# Altium PCB PCB1.PcbDoc
Units mm, origin at the board's own origin, x right, y up, seen from the top; angles counter-clockwise.
Board outline 76.07 x 60.58 mm, 4 copper layers (Top Layer, Int1 (GND), Int2 (PWR), Bottom Layer), stack 1.075 mm thick; 30 components, 31 nets, 155 pads, 45 vias.
Unrouted connection lines stored in the file: 1.
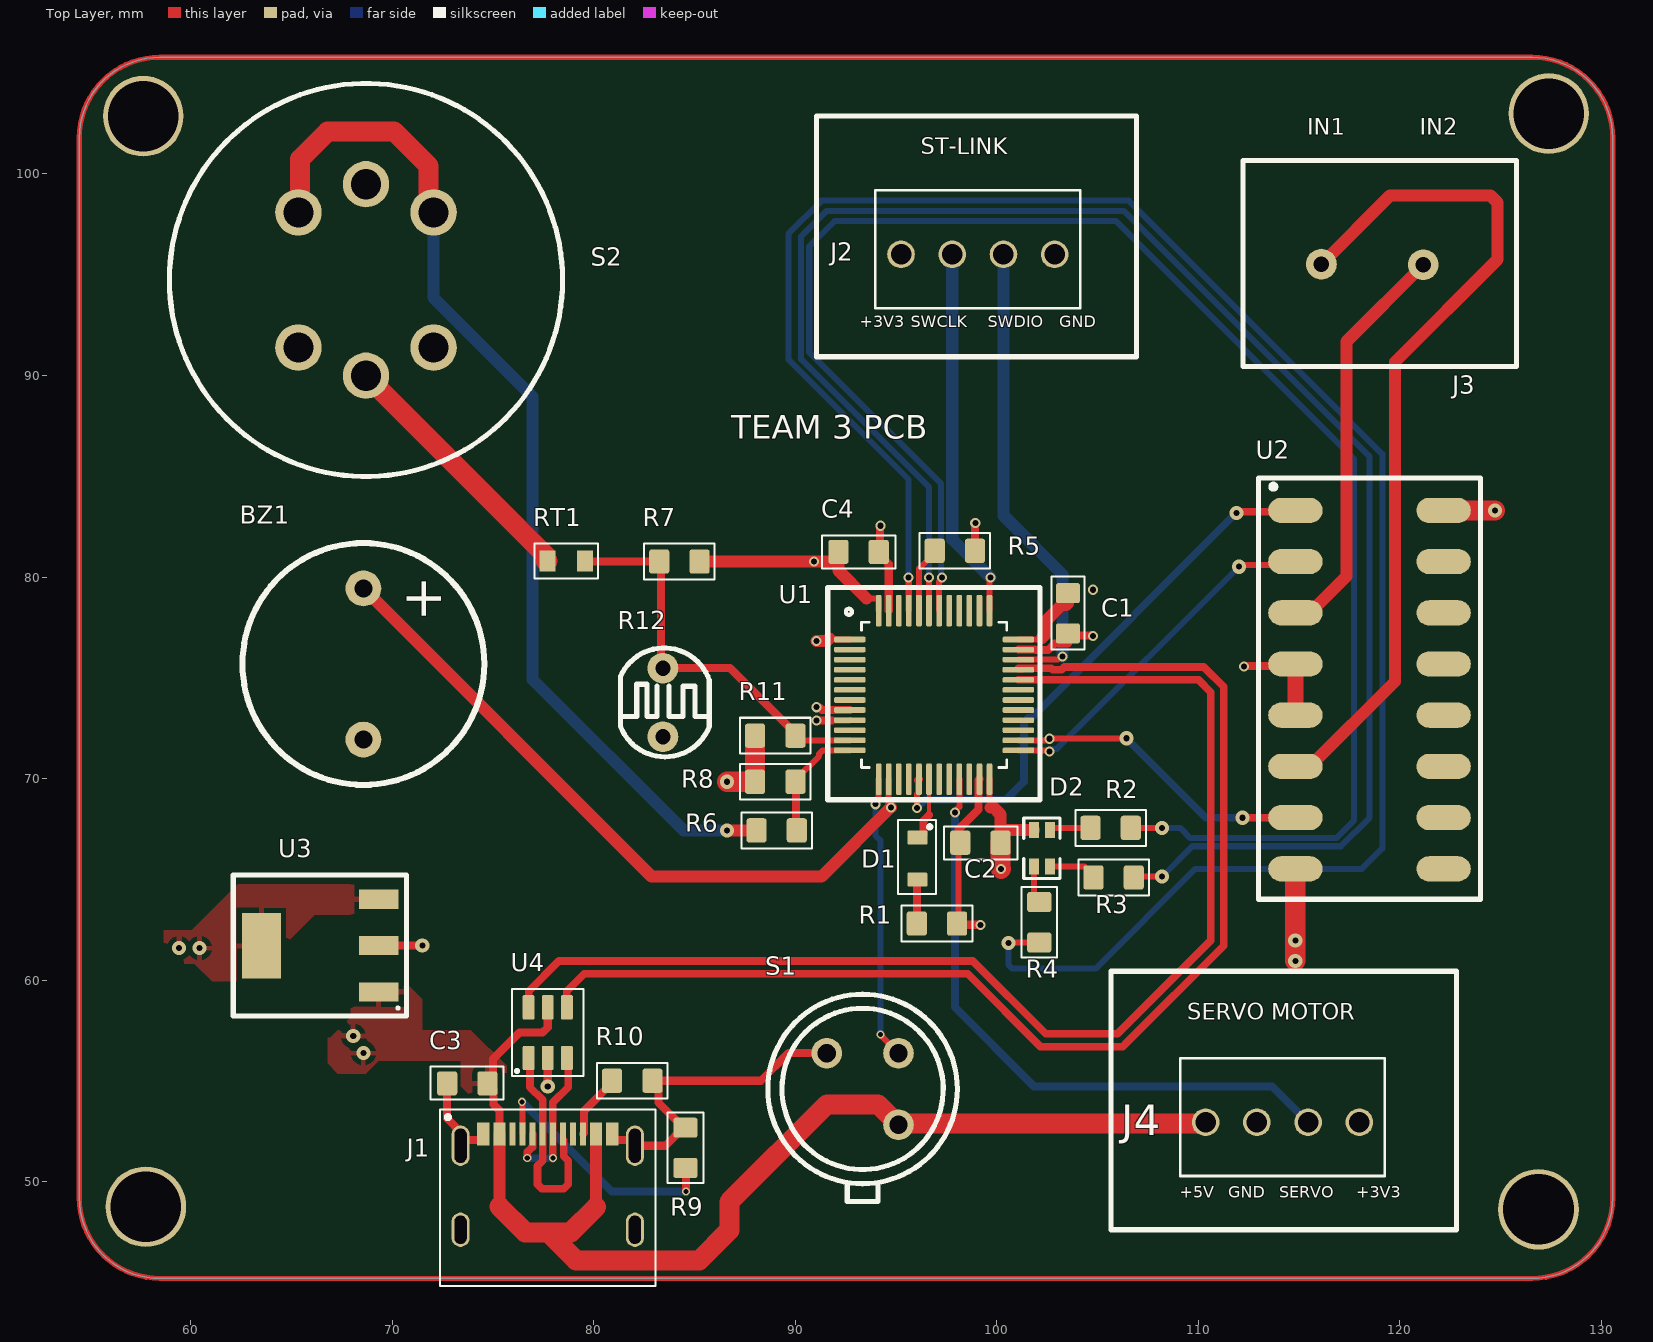
[diagram p0: Top Layer view]
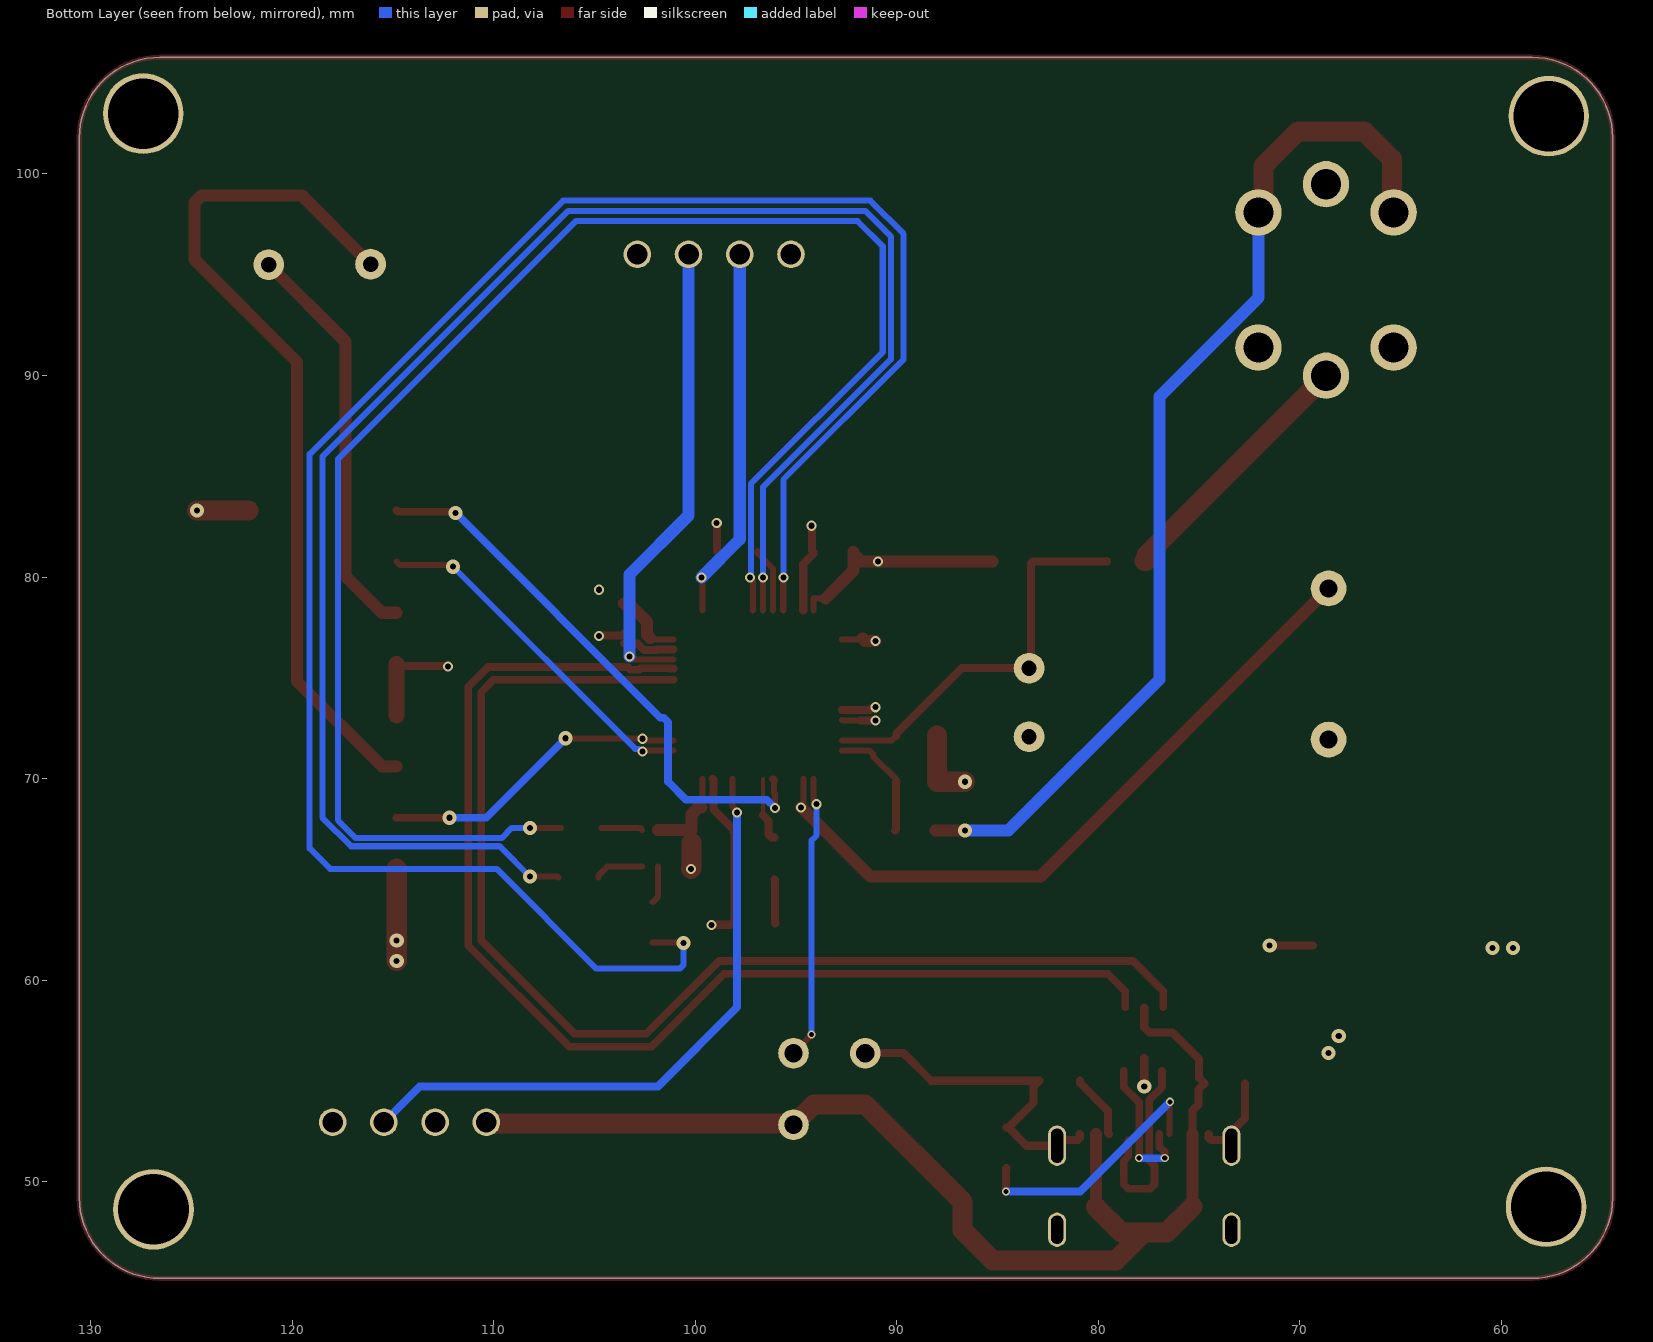
[diagram p1: Bottom Layer view, seen from below]
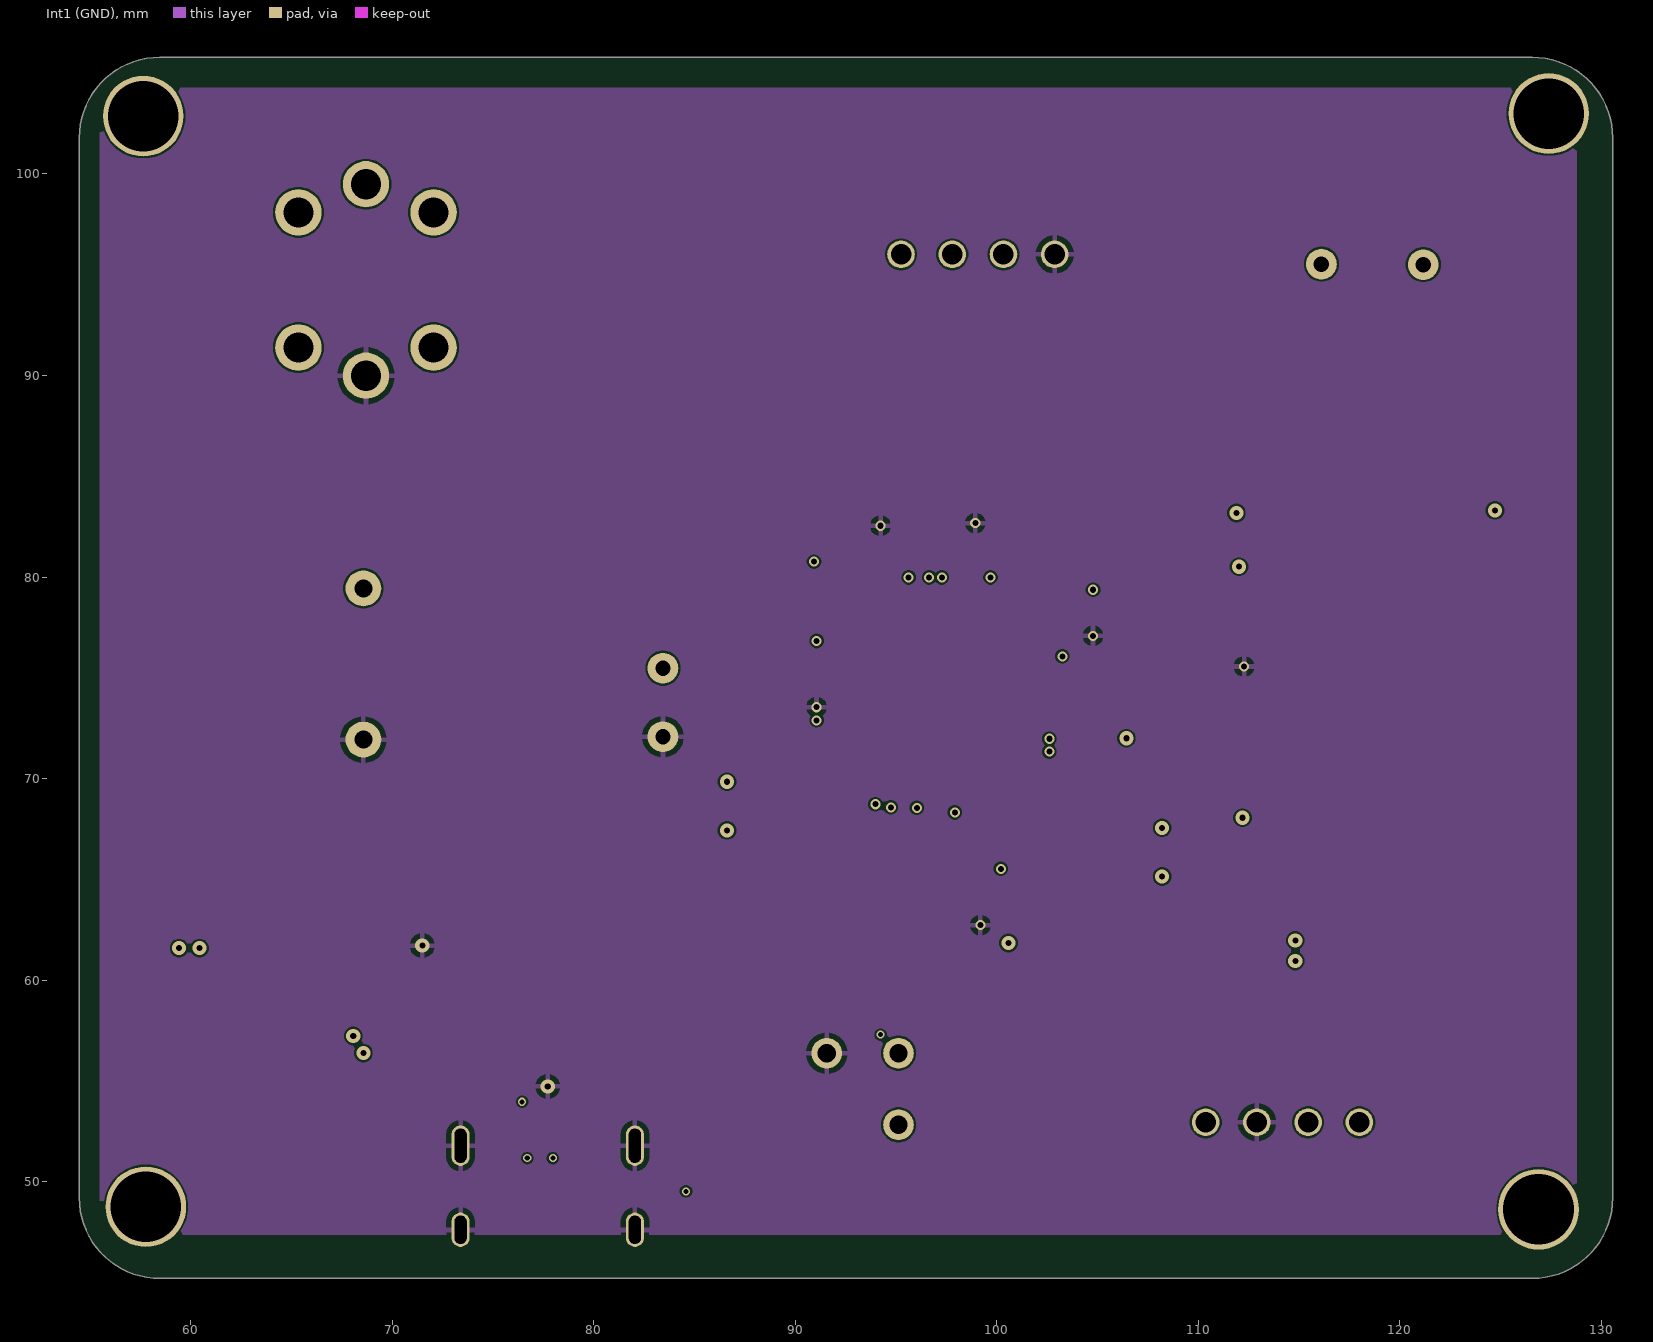
[diagram p2: Int1 (GND)]
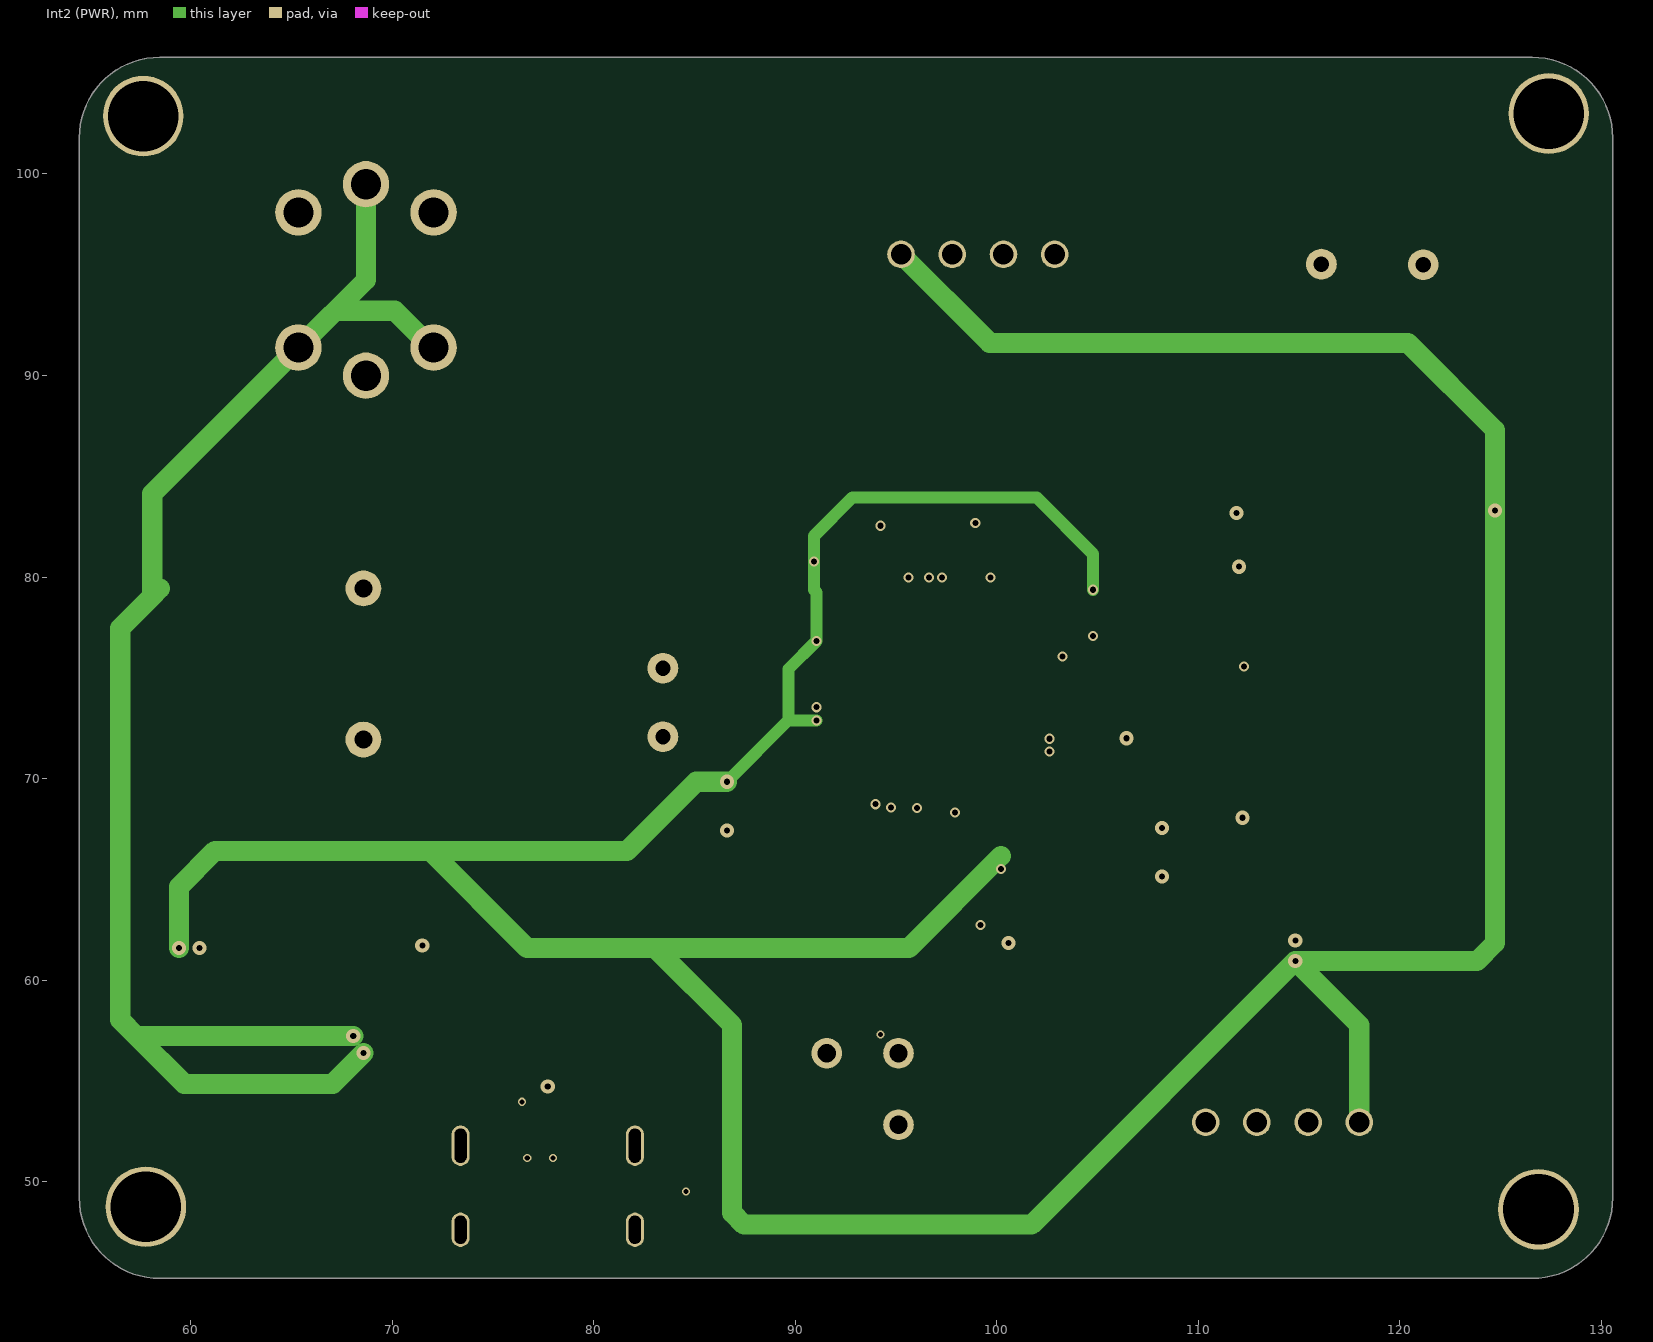
[diagram p3: Int2 (PWR)]

## Layer stack, top to bottom
Top Solder: solder mask 0.0254, SM-001, Dk 4
Top Layer: signal copper 0.035
Dielectric 2: prepreg 0.1295, PP-017, Dk 4.3
Int1 (GND): signal copper 0.0175
Dielectric 3: core 0.7112, Core-039, Dk 4.8
Int2 (PWR): signal copper 0.0175
Dielectric 4: prepreg 0.1295, PP-017, Dk 4.3
Bottom Layer: signal copper 0.035
Bottom Solder: solder mask 0.0254, SM-001, Dk 4

## Board outline
54.483,49.212 54.483,101.791 cw(c58.483,101.791) 58.483,105.791 126.556,105.791 cw(c126.556,101.791) 130.556,101.791 130.556,49.212 cw(c126.556,49.212) 126.556,45.212 58.483,45.212 cw(c58.483,49.212)

## Design rules (kind name [scope] priority, off if disabled: settings)
Clearance [All] p1: gap=0.1 ignorepadtopadclearanceinfootprint=FALSE
DiffPairsRouting [All] p1: maxlimit=0.254 minlimit=0.254 mostfreqgap=0.254 toplayer_minwidth=0.381 toplayer_maxwidth=0.381 toplayer_prefwidth=0.381 midlayer1_minwidth=0.381 midlayer1_maxwidth=0.381 midlayer1_prefwidth=0.381 midlayer2_minwidth=0.381 midlayer2_maxwidth=0.381 midlayer2_prefwidth=0.381 bottomlayer_minwidth=0.381 bottomlayer_maxwidth=0.381 bottomlayer_prefwidth=0.381 maxuncoupledlength=12.7
PolygonConnect [All] p1: connectstyle=Relief reliefconductorwidth=0.254 reliefentries=4 polygonreliefangle="90 Angle" airgapwidth=0.254
RoutingVias [All] p1: holewidth=3 width=1.27 viastyle="Through Hole" minholewidth=0.15 minwidth=1.27 maxholewidth=6.3 maxwidth=6.3
SolderMaskExpansion [All] p1: expansion=0 istentingtop=FALSE
SupplyNets "Schematic Supply Nets_3" [InNet('VBUS')] p1: voltage=0.000
SupplyNets "Schematic Supply Nets_2" [InNet('PA2')] p2: voltage=0.000
SupplyNets "Schematic Supply Nets_1" [InNet('+3.3V')] p3: voltage=0.000
SupplyNets "Schematic Supply Nets" [InNet('GND')] p4: voltage=0.000
UnRoutedNet [All] p1: checkbadconnections=TRUE
Width [All] p1: maxlimit=1 minlimit=0.2 preferedwidth=0.4 minimp=50.000000 maximp=50.000000 favimp=50.000000
28 further rules are at their usual default settings.

## Classes and differential pairs
differential pair class USB_DIFF: USB_D
differential pair class ESD_DIFF: ESD
component class Sheet3: C1 C2 D1 D2 J3 J4 R1 R2 R3 R4 R5 R6 R7 R8 RT1 S1 S2 U1 U2
component class Sheet1: BZ1 C3 C4 J1 J2 Q1 R9 R10 R11 R12 U3 U4
differential pair USB_D: +USB_D_P -USB_D_N
differential pair ESD: +ESD_P -ESD_N

## Components (designator, comment, footprint, x,y, rotation, side; value= is the part's Value field where it differs from the comment)
BZ1 "Buzzer" BUZZER 68.58,75.692 r270 top
C1 "C_1uF" CAP_1uF 103.505,78.232 r270 top
C2 "C_10nF" CAP_10nF 99.187,66.802 r180 top
C3 "C_10uF" CAP_10uF 73.66,54.864 r0 top
C4 "C_10uF" CAP_10uF 93.218,81.28 r180 top
D1 "Yellow_LED" LED_YELLOW 96.012,66.04 r270 top
D2 "RGB_LED" RGB_LED 102.235,66.548 r270 top
J1 "USB_Type_C" USB_TYPE_C 77.724,47.625 r0 top
J2 "ST-LINK" 4_MALE_HEADER 99.06,96.012 r0 top
J3 "Terminal" "Terminal Block" 118.694,95.656 r180 top
J4 "4_Male_Header" 4_MALE_HEADER 114.173,52.959 r0 top
R1 "R_220Ω" RES_220 97.028,62.865 r0 top
R2 "R_220Ω" RES_220 105.645,67.611 r0 top
R3 "R_220Ω" RES_220 105.791,65.151 r0 top
R4 "R_220Ω" RES_220 102.155,62.884 r270 top
R5 "R_1kΩ" RES_1K 97.917,81.28 r0 top
R6 "R_10KΩ" RES_10K 89.027,67.437 r0 top
R7 "R_10KΩ" RES_10K 84.201,80.772 r0 top
R8 "R_10KΩ" RES_10K 89.064,69.853 r180 top
R9 "R_5.1KΩ" RES_5.1K 84.582,51.689 r90 top
R10 "R_5.1KΩ" RES_5.1K 81.915,54.991 r0 top
R11 "R_10KΩ" RES_10K 89.064,72.139 r180 top
R12 "Photoresistor" PHOTORESISTOR 83.439,73.787 r180 top
RT1 "THERMISTOR" NTC_THERMISTOR 78.613,80.772 r180 top
S1 "muRata IRA" OPTICAL_SENSOR 93.345,54.61 r90 top
S2 "Gas sensors" GAS_SENSOR 68.707,94.742 r0 top
U1 "STM32F103C8T6" STM32 96.889,74.182 r0 top
U2 "L293D Motor Driver" L293D 118.491,74.422 r0 top
U3 "AMS1117-3.3" AMS1117_3.3V 66.421,61.722 r180 top
U4 "ESD_Protection" ESD_PROTECTION 77.724,57.404 r90 top

## Footprints (in the part's own frame and the unit in brackets; to place one, negate y for a bottom-side part, rotate by r counter-clockwise, add the part's x,y. Pads: shape width x height; smd on the part's side, far side on the other; paste and mask are expansions set on the pad)
4_MALE_HEADER [mm]
  round 1.37 hole 1.02: 188(-3.81,0) 189(-1.27,0) 190(1.27,0) 191(3.81,0)
  silkscreen extent -5.08,-2.67 5.08,3.18, body extent -5.08,-2.67 5.08,3.17, height 9.53
AMS1117_3.3V [mm] "SOT223, 4-Leads, Body 6.48x7.00mm (avg), Pitch 2.30mm, IPC Medium Density"
  rect 1.95x0.95 smd: 1(-2.925,0) 2(-2.925,2.3) 3(-2.925,-2.3)
  rect 1.95x3.25 smd: 3(2.9,0)
  silkscreen extent -4.3,-3.5 4.3,3.5, body extent -1.75,-3.24 1.75,3.24, height 1
BUZZER [mil]
  round 70 hole 35.4: 1(-147.7,0) 2(147.6,0)
  silkscreen extent -236,-236 236,236, body extent -236,-236 236,236, height 354
CAP_1uF [mm]
  rrect25% 1x1.2 smd: 1(-0.975,0.025) 2(1.025,0.025)
  silkscreen extent -1.8,-0.79 1.83,0.85, body extent -0.97,-0.6 1.03,0.65, height 0.4
CAP_10nF [mm]
  rrect25% 1x1.2 smd: 1(-1,-0.025) 2(1,-0.025)
  silkscreen extent -1.83,-0.84 1.8,0.8, body extent -1,-0.65 1.01,0.6, height 0.4
CAP_10uF [mm]
  rrect25% 1x1.2 smd: 1(-0.925,0.025) 2(1.075,0.025)
  silkscreen extent -1.75,-0.79 1.88,0.85, body extent -0.92,-0.6 1.08,0.65, height 0.4
ESD_PROTECTION [mm]
  rrect25% 1.21x0.59 smd: 140(-1.255,0.95) 141(-1.255,0) 142(-1.255,-0.95) 143(1.255,0.95) 144(1.255,0) 145(1.255,-0.95)
  silkscreen extent -2.16,-1.78 2.16,1.78, body extent -1.4,-1.46 1.4,1.46, height 1.42
GAS_SENSOR [mil]
  round 90.6 hole 59.1: 1(-132,132) 2(0,187) 3(132,132) 4(132,-132) 5(0,-187) 6(-132,-132)
  silkscreen extent -384,-384 384,384, body extent -344,-344 344,344, height 585
L293D [mm] "SOJ, 16-Leads, Body 20.00x8.80mm, Pitch 2.54mm, IPC Low Density"
  oval 2.7x1.25 smd: 1(-3.675,8.89) 2(-3.675,6.35) 3(-3.675,3.81) 4(-3.675,1.27) 5(-3.675,-1.27) 6(-3.675,-3.81) 7(-3.675,-6.35) 8(-3.675,-8.89) 9(3.675,-8.89) 10(3.675,-6.35) 11(3.675,-3.81) 12(3.675,-1.27) 13(3.675,1.27) 14(3.675,3.81) 15(3.675,6.35) 16(3.675,8.89)
  silkscreen extent -5.5,-10.4 5.5,10.5, body extent -3.55,-10 3.55,10, height 2.5
LED_YELLOW [mm]
  rrect25% 0.7x1 smd: 1(-1.041,0.051) 2(1.041,0.051)
  silkscreen extent -1.91,-0.91 1.75,0.97, body extent -0.97,-0.57 1.03,0.68, height 0.75
NTC_THERMISTOR [mm]
  rect 0.8x1.05 smd: 1(-0.95,-0.025) 2(0.9,-0.025)
  silkscreen extent -1.6,-0.9 1.55,0.85, body extent -1.03,-0.63 0.97,0.57, height 1.3
OPTICAL_SENSOR [mil]
  round 60 hole 36: 1(-70,-70) 2(70,-70) 3(70,70)
  silkscreen extent -220,-185 185,185, body extent -220,-182 183,180, height 193
PHOTORESISTOR [mil]
  round 60 hole 30: 1(0,66.9) 2(0,-66.9)
  silkscreen extent -91,-106 83,106, body extent -84,-101 84,99, height 94
RES_1K [mm]
  rrect25% 1x1.2 smd: 1(-0.997,0.028) 2(1.003,0.028)
  silkscreen extent -1.75,-0.86 1.76,0.92, body extent -1,-0.62 1,0.68, height 0.5
RES_5.1K [mm]
  rrect25% 1x1.2 smd: 1(-0.997,0.028) 2(1.003,0.028)
  silkscreen extent -1.75,-0.86 1.76,0.92, body extent -1,-0.62 1,0.68, height 0.5
RES_10K [mm]
  rrect25% 1x1.2 smd: 1(-0.947,0.003) 2(1.053,0.003)
  silkscreen extent -1.7,-0.89 1.81,0.89, body extent -0.95,-0.65 1.05,0.65, height 0.5
RES_220 [mm]
  rrect25% 1x1.2 smd: 1(-0.997,-0.047) 2(1.003,-0.047)
  silkscreen extent -1.75,-0.94 1.76,0.84, body extent -1,-0.7 1,0.6, height 0.5
RGB_LED [mil]
  rect 31.5x19.7 smd paste+0 mask+2: 1(-35.5,15.8) 2(35.4,15.8) 3(35.4,-15.7) 4(-35.5,-15.7)
  silkscreen extent -59,-35 59,35, body extent -39,-25 39,25, height 43
STM32 [mm] "LQFP, 48-Leads, Body 11.50x11.50mm, Pitch 0.50mm, IPC Medium Density"
  rrect50% 1.56x0.28 smd: 1(-4.18,2.725) 2(-4.18,2.225) 3(-4.18,1.725) 4(-4.18,1.225) 5(-4.18,0.725) 6(-4.18,0.225) 7(-4.18,-0.275) 8(-4.18,-0.775) 9(-4.18,-1.275) 10(-4.18,-1.775) 11(-4.18,-2.275) 12(-4.18,-2.775) 25(4.18,-2.775) 26(4.18,-2.275) 27(4.18,-1.775) 28(4.18,-1.275) 29(4.18,-0.775) 30(4.18,-0.275) 31(4.18,0.225) 32(4.18,0.725) 33(4.18,1.225) 34(4.18,1.725) 35(4.18,2.225) 36(4.18,2.725)
  rrect50% 0.28x1.56 smd: 13(-2.75,-4.205) 14(-2.25,-4.205) 15(-1.75,-4.205) 16(-1.25,-4.205) 17(-0.75,-4.205) 18(-0.25,-4.205) 19(0.25,-4.205) 20(0.75,-4.205) 21(1.25,-4.205) 22(1.75,-4.205) 23(2.25,-4.205) 24(2.75,-4.205) 37(2.75,4.155) 38(2.25,4.155) 39(1.75,4.155) 40(1.25,4.155) 41(0.75,4.155) 42(0.25,4.155) 43(-0.25,4.155) 44(-0.75,4.155) 45(-1.25,4.155) 46(-1.75,4.155) 47(-2.25,4.155) 48(-2.75,4.155)
  silkscreen extent -5.28,-5.23 5.25,5.3, body extent -4.5,-4.53 4.5,4.47, height 1.6
"Terminal Block" [mil]
  round 60 hole 30: 15(-97,6) 16(102,5)
  silkscreen extent -279,-197 255,205, body extent -223,-156 201,166, height 394
USB_TYPE_C [mm]
  rect 0.6x1.14 smd mask+0.05: 36(-2.4,4.75) 37(2.4,4.75) 46(-3.2,4.75) 47(3.2,4.75)
  rect 0.3x1.14 smd mask+0.05: 38(-1.25,4.75) 39(-0.25,4.75) 40(0.25,4.75) 41(1.25,4.75) 42(1.75,4.75) 43(0.75,4.75) 44(-0.75,4.75) 45(-1.75,4.75)
  oval 0.9x2 hole 0.6 slot 1.7 at 90 deg: 48(-4.325,4.17) 50(4.325,4.17)
  oval 0.9x1.7 hole 0.6 slot 1.4 at 90 deg: 49(-4.325,0) 51(4.325,0)
  silkscreen extent -5.33,-2.79 5.33,5.97, body extent -4.47,-2.6 4.47,5.31, height 3.31

## Part data
BZ1: "Active Buzzer (Built-in Driving Circuit) 2.4kHz 5V Electromagnetic Through Hole,D=12mm Alarms, Buzzers, and Sirens RoHS", ComponentLink1Description=Datasheet, ComponentLink1URL=https://www.lcsc.com/datasheet/C6143962.pdf?spm=wm.sxq.inf.ggs___wm.fly.bg.26.xh&lcsc_vid=EwQNUwAFEwJeBFwCQlANU10CTwBcVlBTFAMMV1FeQFkxVlNeT1hfV1VeRFhaVDsOAxUeFF5JWBYZEEoKFBINSQcJGk4eFQsCAgIaSgADAwAHC0slRlNdU1RIHxUDCw%3D%3D, MF=CUI, MPU=CMI-1295IC-0585T, Supplier=LCSC, Supplier part #=C6143962
C1: "CAP CER 1uF 50V X7R 0805", MFR="Samsung Electro-Mechanics", MFR Part #=CL21B105KBFNNNE, ComponentLink1Description="Supplier Part Page", ComponentLink1URL=https://www.lcsc.com/product-detail/C28323.html?s_z=n_q_t_capacitor%25201uF%25200805&spm=wm.fly.bg.0.xh___wm.ssy.tc.0.tz&lcsc_vid=RVdfAQAHTlQNBQIDRgNYVAdUQ1hWXlBRQ1kLVlcDRVkxVlNeQFNcUlVTRVdZXjsOAxUeFF5JWBYZEEoKFBINSQcJGk4NBhADEA4cHktXRlVcSQwSGg0%3D, Supplier=LCSC, Supplier part #=C28323
C2: "CAP CER 10nF 50V X7R 0805", MFR="Samsung Electro-Mechanics", MFR part#=CL21B103KBANNNC, ComponentLink1Description=Datasheet, ComponentLink1URL=https://www.lcsc.com/datasheet/C1710.pdf?spm=wm.sxq.inf.ggs___wm.fly.bg.0.xh&lcsc_vid=E1EMUFFTQQILUVRVRlhaUAYEQ1RWA1RTFlhWXwYAQlkxVlNeT1hWUldWT1NZUDsOAxUeFF5JWBYZEEoKFBINSQcJGk4dAgUUFAk%3D, Supplier=LCSC, Suppliere part #=C1710
C3 C4: "CAP CER 10uF 25V X5R 0805", MFR="Samsung Electro-Mechanics", MFR Part #=CL21A106KAYNNNE, ComponentLink1Description="Suplpier Part Page", Supplier=LCSC, Supplier part #=C15850
D1: "LED YELLOW GREEN 0805 SMD", ComponentLink1Description=Datasheet, ComponentLink1URL=https://www.lcsc.com/datasheet/C19171393.pdf?spm=wm.sxq.inf.ggs___wm.fly.bg.6.xh&lcsc_vid=E1EMUFFTQQILUVRVRlhaUAYEQ1RWA1RTFlhWXwYAQlkxVlNeT1JYU1JRRFhbVTsOAxUeFF5JWBYZEEoKFBINSQcJGk4dAgUUFAk%3D, MFU=YONGYUTAI, MFU code #=YLED0805YG, Supplier=LCSC, Supplier code #=C19171393
D2: "120° SMD-4P,2x1.2mm LED Indication - Discrete", MPN=MHT170RGBCT, ComponentLink1Description=Datasheet, ComponentLink1URL=https://www.lcsc.com/datasheet/C2962094.pdf?spm=wm.sxq.inf.ggs&lcsc_vid=EwQNUwAFEwJeBFwCQlANU10CTwBcVlBTFAMMV1FeQFkxVlNeT1deXlFfQlVbVztW, MF=MEIHUA, Supplier=LCSC, Supplier part #=C2962094
J1: "CONN RCPT Type-C 16POS SMD", MFR="Korean Hroparts Elec", MFR Part #=TYPE-C-31-M-12, ComponentLink1Description="Supplier Part Link", ComponentLink1URL=https://www.lcsc.com/product-detail/C165948.html?s_z=n_q_p_USB%2520type%2520C%2520jack&spm=wm.ssy.bg.1.xh&lcsc_vid=RVdfAQAHTlQNBQIDRgNYVAdUQ1hWXlBRQ1kLVlcDRVkxVlNeQVRbX1xSR1hWXjsOAxUeFF5JWBYZEEoKFBINSQcJGk4dAgUUFAk%3D, Supplier=LCSC, Supplier part #=C165948
J2: library part 4_Male_Header, "PCB Mount Header, Vertical, Wire-to-Board, 4 Position, 2.54 mm Centerline, Partially Shrouded, Gold, Through Hole - Solder, Signal", MFR="TE Connectivity", MFR Part #=3-641215-4, ComponentLink1Description="Supplier Part Page", ComponentLink1URL=https://www.lcsc.com/product-detail/C5119032.html?s_z=n_q_3-641215-4&spm=wm.fly.bg.0.xh&lcsc_vid=RVdfAQAHTlQNBQIDRgNYVAdUQ1hWXlBRQ1kLVlcDRVkxVlNeQFNcX1FURVRaVzsOAxUeFF5JWBYZEEoKFBINSQcJGk4dAgUUFAk%3D, Supplier=LCSC, Supplier part #=C5119032
J3: "0.05~1.3 -40℃~+110℃ 13.5A 1x2P Green 16~30 Through Hole 2 1 5.08mm Through Hole Wire to Board RoHS", MFR="TE Connectivity", MFR Part #=282837-2, ComponentLink1Description="Supplier Page Link", ComponentLink1URL=https://www.lcsc.com/product-detail/C592976.html?s_z=n_q_282837-2&spm=wm.fly.bg.0.xh&lcsc_vid=RVdfAQAHTlQNBQIDRgNYVAdUQ1hWXlBRQ1kLVlcDRVkxVlNeQVVbUVJXT1RdUTsOAxUeFF5JWBYZEEoKFBINSQcJGk4NBhADEA4cHkteQ1NADxALGw%3D%3D, Supplier=LCSC, Supplier part #=C592976
J4: "PCB Mount Header, Vertical, Wire-to-Board, 4 Position, 2.54 mm Centerline, Partially Shrouded, Gold, Through Hole - Solder, Signal", MFR="TE Connectivity", MFR Part #=3-641215-4, ComponentLink1Description="Supplier Part Page", ComponentLink1URL=https://www.lcsc.com/product-detail/C5119032.html?s_z=n_q_3-641215-4&spm=wm.fly.bg.0.xh&lcsc_vid=RVdfAQAHTlQNBQIDRgNYVAdUQ1hWXlBRQ1kLVlcDRVkxVlNeQFNcX1FURVRaVzsOAxUeFF5JWBYZEEoKFBINSQcJGk4dAgUUFAk%3D, Supplier=LCSC, Supplier part #=C5119032
R1 R2 R3 R4: "RES 220Ω ±1% 125mW 0805", MFR=UNI-ROYAL, MFR Part #=0805W8F2200T5E, ComponentLink1Description="Supplier Part Page", ComponentLink1URL=https://www.lcsc.com/product-detail/C17557.html?s_z=n_q_resistor%2520220%2520ohm%25200805&spm=wm.fly.bg.0.xh&lcsc_vid=RVdfAQAHTlQNBQIDRgNYVAdUQ1hWXlBRQ1kLVlcDRVkxVlNeQFBaUVdQRVVeUDsOAxUeFF5JWBYZEEoKFBINSQcJGk4eFQsCAgIaSgADAwAHC0slQFRfXkoOAwwC, Supplier=LCSC, Supplier part #=C17557
R5: "RES 1kΩ ±1% 100mW 0805", ComponentLink1Description=Datasheet, ComponentLink1URL=https://www.lcsc.com/datasheet/C2907002.pdf?spm=wm.sxq.inf.ggs___wm.fly.bg.3.xh&lcsc_vid=QAQMVlZTQQVfVwJVQgNaVAUDRlAKAlQCTwJdAQVSRFgxVlNeQVZcVl1fTlhaUjsOAxUeFF5JWBYZEEoEHg8JSQcJGk4%3D, MFU=FOJAN, MFU part #=FRC0603F1001TS, Supplier=LCSC, Supplier part #=C2907002
R6 R7 R8 R11: "RES 10kΩ ±1% 125mW 0805", MFR=FOJAN, MFR Part #=FRC0805F1002TS, ComponentLink1Description="Supplier Part Page", ComponentLink1URL=https://www.lcsc.com/product-detail/C2907219.html?s_z=n_q_p_resistor%252010K%2520ohm%25200805&spm=wm.ssy.bg.0.xh&lcsc_vid=RVdfAQAHTlQNBQIDRgNYVAdUQ1hWXlBRQ1kLVlcDRVkxVlNeQFBaUVNST1NfVjsOAxUeFF5JWBYZEEoKFBINSQcJGk4dAgUUFAk%3D, Supplier=LCSC, Supplier part #=C2907219
R9 R10: "RES 5.1kΩ ±1% 125mW 0805", MFR=UNI-ROYAL, MFR Part #=0805W8F5101T5E, ComponentLink1Description="Supplier Part Page", ComponentLink1URL=https://www.lcsc.com/product-detail/C27834.html?s_z=n_q_p_resistor%25205.1K%2520ohm%25200805&spm=wm.ssy.bg.0.xh&lcsc_vid=RVdfAQAHTlQNBQIDRgNYVAdUQ1hWXlBRQ1kLVlcDRVkxVlNeQFBaUVFQRlVeUTsOAxUeFF5JWBYZEEoKFBINSQcJGk4NBhADEA4cHktXRlhXSQwSGg0%3D, Supplier=LCSC, Supplier part #=C27834
R12: "540nm 5kΩ~10kΩ 500kΩ Through Hole,P=3mm Photoresistors", MPN=GL5516, ComponentLink1Description=Datasheet, ComponentLink1URL=https://www.lcsc.com/datasheet/C125626.pdf?spm=wm.sxq.inf.ggs___wm.ssy.bg.1.xh&lcsc_vid=E1EMUFFTQQILUVRVRlhaUAYEQ1RWA1RTFlhWXwYAQlkxVlNeT1JYU1dRT1heVTsOAxUeFF5JWBYZEEoKFBINSQcJGk4NBhADEA4cHktQRVVADxALGw%3D%3D, MF="Senba Sensing Tech", Supplier=LCSC, Supplier part #=C125626
RT1: "THERMISTOR NTC 10kΩ 3950K 0805", MPN #=KNTC0805/10KF3950, ComponentLink1Description=Datasheet, ComponentLink1URL=https://www.lcsc.com/datasheet/C2892549.pdf?spm=wm.sxq.inf.ggs___wm.fly.bg.2.xh&lcsc_vid=E1EMUFFTQQILUVRVRlhaUAYEQ1RWA1RTFlhWXwYAQlkxVlNeT1JYVV1fQVFWVzsOAxUeFF5JWBYZEEoKFBINSQcJGk4%3D, MF=KUU, Supplier=LCSC, Supplier part #=C2892549
S1: "Through Hole Optical Motion Sensors RoHS", MPN=IRA-S210ST01, ComponentLink1Description=Datasheet, ComponentLink1URL=https://www.lcsc.com/datasheet/C152563.pdf?spm=wm.sxq.inf.ggs___wm.fly.bg.0.xh&lcsc_vid=E1EMUFFTQQILUVRVRlhaUAYEQ1RWA1RTFlhWXwYAQlkxVlNeT1JYVFZXRVhcUDsOAxUeFF5JWBYZEEoKFBINSQcJGk4dAgUUFAk%3D, MF=muRata, Supplier=LCSC, Supplier part #=C152563
S2: "300ppm~10000ppm Through Hole Gas Sensors", MPN=MQ-5, ComponentLink1Description=Datasheet, ComponentLink1URL=https://www.lcsc.com/datasheet/C99297.pdf?spm=wm.sxq.inf.ggs___wm.ssy.em.0.tz&lcsc_vid=E1EMUFFTQQILUVRVRlhaUAYEQ1RWA1RTFlhWXwYAQlkxVlNeT1JYVF1QQ1ZWUjsOAxUeFF5JWBYZEEoKFBINSQcJGk4eFQsCAgIaSgADAwAHC0slQ1NaVFVeQVZADxALGw%3D%3D, MF="Zhengzhou Winsen Elec Tech", Supplier=LCSC, Supplier part #=C99297
U1: "-40℃~+85℃ 12bit 20KB 2V~3.6V 32 Bit 37 64KB 72MHz ARM Cortex-M3 Built-in FLASH LQFP-48(7x7) Microcontrollers (MCU/MPU/SOC) ROHS", MFR Part #=STMicroelectronics, ComponentLink1Description=Datasheet, ComponentLink1URL=https://jlc-prod-smt.oss-eu-central-1.aliyuncs.com/smtDataManualFile/8579708215770480640-C8734.pdf?response-content-disposition=attachment%3B%20filename%3DC8734.pdf%3B%20filename%2A%3DUTF-8%27%27C8734.pdf&x-oss-date=20260822T112136Z&x-oss-expires=1800&x-oss-security-token=CAISgAN1q6Ft5B2yfSjIr5r9HuPMuopW9JKdbW3Sg0MBbvdkhped1jz2IHhMdHJsAOodtv0%2FmmhT6PkclqRLcbhpcmfjV%2BZHzLB8qf5B%2Bykr557b16cNrbH4M4H6aXeirtuwDsz9SNTCALjPD3nPii50x5bjaDymRCbLGJaViJlhHLN1Ow6jdmhpCctxLAlvo9NgFxm3D%2Fu2NQPwiWf9FVdhvhEG6Vly8qOi2MaRmFy8yFTx0b0SvJ%2BjYMrmPctoN9JnSdC5mfdzau3a1TJ84gRD0a5wkaVA1zbDs5bfISEIuUzebreLqY03dV4mOvdqIcMe8qigz88fk%2FfIioH6xyxKOexoSCnFTOiiupCcQLPyao9jLu6iayqViY7QaIOTqQohZmkAMwVOasAsI3Ngh4zF97Qt0cVNkXO9gWfLI8DtuMleWmpnyfoJs6HD0eS19jklBdzSlusJRAJJUVBflCeKEaRNSAd3WGhEfM2%2BBt4QT30w5N2u00S8OSMILh50ZKKWD5sagAERxjOFVQunN%2FMP%2B4pPj192lIv%2Fb%2FBhYoH1dXybskWmVsGIA0U6FIyufmkP83RoZanjtyEj%2FMYM6ZCoxn9wNR1FUWyys6LeuQiyfFaBwd42eAW9cxY8QGfZwYhiboSH%2Bd%2FHYxRsYJhTEvCPbbJHyAklPAFDR4R0AEccKLctMzybhSAA&x-oss-signature-version=OSS4-HMAC-SHA256&x-oss-credential=STS.NYHUYxWUwCPvoKcgCTbxHiR64%2F20260822%2Feu-central-1%2Foss%2Faliyun_v4_request&x-oss-signature=046f7eb699a18f694d803c947e8fbc0a7e9770749a7982aa4ec2455890b0bf02, MF=STMicroelectronics, Supplier=JLCPCB, Supplier part #=C8734
U2: "PUSH-PULL FOUR CHANNEL DRIVER WITH DIODES", MFR=HGSEMI, ComponentLink1Description=Datasheet, ComponentLink1URL=https://www.lcsc.com/datasheet/C2973803.pdf?spm=wm.sxq.inf.ggs___wm.fly.bg.1.xh&lcsc_vid=E1EMUFFTQQILUVRVRlhaUAYEQ1RWA1RTFlhWXwYAQlkxVlNeT1hZUFxVT1RXVzsOAxUeFF5JWBYZEEoKFBINSQcJGk4%3D, MRF Part #=L293DDM/TR, Supplier=LCSC, Supplier part #=C2973803
U3: "1A Low Dropout (LDO) Regulator", ComponentLink1Description=Datasheet, ComponentLink1URL=https://www.lcsc.com/datasheet/C6187.pdf?spm=wm.sxq.inf.ggs&lcsc_vid=QAQMVlZTQQVfVwJVQgNaVAUDRlAKAlQCTwJdAQVSRFgxVlNeQVZcVFVRRFlWUzsOAxUeFF5JWBYZEEoEHg8JSQcJGk4%3D, MFU="Advanced Monolithic Systems", MFU part #=AMS1117-3.3, Supplier=LCSC, Supplier part #=C6186
U4: "ESD DIODE 5.25VWM 17VC SOT-23-6L", MFR=ST, MFR Part #=USBLC6-2SC6, ComponentLink1Description="Supplier Part Page", ComponentLink1URL=https://www.lcsc.com/product-detail/C7519.html?s_z=s_p_USBLC6-2SC6&spm=wm.fly.bg.0.xh&lcsc_vid=RVdfAQAHTlQNBQIDRgNYVAdUQ1hWXlBRQ1kLVlcDRVkxVlNeQFBaVF1VT1haUTsOAxUeFF5JWBYZEEoKFBINSQcJGk4dAgUUFAk%3D, Supplier=LCSC, Supplier part #=C7519

## Free pads (board coordinates)
  round 4 hole 3.5: 29(57.658,102.87) 30(127.381,102.997) 31(126.873,48.641) 32(57.785,48.768)

## Via types
v1: diameter 0.5, hole 0.3, Top Layer to Bottom Layer, 21 vias
v2: diameter 0.7, hole 0.3, Top Layer to Bottom Layer, tented both sides, 17 vias
v3: diameter 0.4, hole 0.25, Top Layer to Bottom Layer, 5 vias
v4: diameter 0.5, hole 0.3, Top Layer to Bottom Layer, tented both sides, 1 vias
v5: diameter 0.7, hole 0.3, Top Layer to Bottom Layer, 1 vias

## Nets (pads, with @x,y where several pads share a name; then routed paths per layer and width w, separated by ;. In a path a pad name is that pad's centre, name@x,y a point inside that pad or via, vN(x,y) a via of type N, cw(c..) or ccw(c..) an arc to the next point about the centre after c; other vN are vias at no path point)
+3.3V: C1.1 C2.1 C4.2 D2.4 J2.188 J4.191 R7.2 R8.2 R11.2 U1.1 U1.9 U1.24 U1.36 U1.48 U2.8 U2.16 U3.3 | length 258.9
  Top Layer w0.3: 91.694,76.962 91.739,76.917 92.699,76.917 U1.1 ; 91.821,72.898 92.7,72.898 U1.9 ; 93.529,78.947 94.129,78.947 94.139,78.937 U1.48 ; U1.24 99.639,68.636 99.695,68.58 ; U1.36 101.079,76.917 102.175,76.917 102.235,76.977
  Top Layer w0.4: v1(91.059,72.898) 91.821,72.898
  Top Layer w0.6: R7.2 91.763,80.775 92.143,81.155 C4.2 92.143,80.333 93.529,78.947 ; v1(91.059,76.835) 91.567,76.835 91.694,76.962 ; 99.695,68.58 99.836,68.58 100.187,68.229 100.187,67.462 100.193,67.456 101.83,67.456 D2.4 ; 102.235,76.977 102.381,77.123 102.381,77.777 103.23,78.626 103.457,78.626 103.53,78.699
  Top Layer w1: v2(86.614,69.85) R8.2 R11.2 ; C2.1 100.187,65.548 v4(100.203,65.532) ; v2(114.808,60.96) v2(114.808,61.976) 114.808,65.524 U2.8 ; U2.16 v2(124.714,83.312)
  Int2 (PWR) w0.6: v2(86.614,69.85) 89.662,72.898 ; v1(91.059,72.898) 89.662,72.898 ; v1(104.775,79.375) 104.775,81.153 101.981,83.947 92.837,83.947 90.932,82.042 v1(90.932,80.772) 90.932,79.375 91.059,79.248 v1(91.059,76.835) 89.662,75.438 89.662,72.898
  Int2 (PWR) w1: v2(59.436,61.595) 59.436,64.643 61.214,66.421 71.882,66.421 ; v2(86.614,69.85) 85.09,69.85 81.661,66.421 71.882,66.421 ; J2.188 99.642,91.62 120.393,91.62 124.714,87.298 v2(124.714,83.312) 124.714,61.849 123.825,60.96 v2(114.808,60.96) ; 100.203,66.167 95.631,61.595 83.058,61.595 ; J4.191 117.983,57.785 v2(114.808,60.96) ; 71.882,66.421 76.708,61.595 83.058,61.595 ; 83.058,61.595 86.868,57.785 86.868,48.465 87.454,47.879 101.727,47.879 v2(114.808,60.96)
  other v2: 60.452,61.595
ESD_N: U1.33 U4.145 | length 60.8
  Top Layer w0.381: U4.145 78.674,59.454 79.545,60.325 98.552,60.325 102.167,56.71 106.249,56.71 106.435,56.896 111.252,61.713 111.252,74.558 110.268,75.542 103.357,75.542 103.221,75.406 102.773,75.406 102.702,75.476 101.261,75.476 101.251,75.466 U1.33@101.069,75.466
ESD_P: U1.32 U4.143 | length 60.8
  Top Layer w0.381: U4.143 76.774,59.454 78.28,60.96 98.815,60.96 102.43,57.345 105.986,57.345 110.617,61.976 110.617,74.295 110.005,74.907 U1.32
GND: BZ1.2 C1.2 C2.2 C3.1 C4.1 J1.46 J1.47 J1.48 J1.49 J1.50 J1.51 J2.191 J4.189 R1.2 R5.2 R9.2 R10.2 R12.1 RT1.2 S1.3 S2.5 U1.8 U1.23 U1.35 U1.47 U2.4 U2.5 U3.1 U4.141 | length 63.1
  Top Layer w0.3: R1.2@98.109,62.896 C2.2@98.109,67.384
  Top Layer w0.4: U3.1 v2(71.501,61.722) ; C3.1 72.735,53.144 73.399,52.48 J1.48@73.399,51.854 ; J1.48 J1.48@73.399,51.854 ; J1.46 74.524,52.185 74.424,52.085 73.63,52.085 J1.48@73.399,51.854 ; v5(77.724,54.737) U4.141 ; J1.47 80.924,52.185 81.024,52.085 81.818,52.085 82.049,51.854 J1.50 83.558,51.795 R9.2@84.454,52.692 ; R9.2 R9.2@84.454,52.692 ; v1(91.059,73.548) 91.078,73.529 91.207,73.529 91.329,73.407 U1.8 ; S1.3 89.662,56.388 88.293,55.019 R10.2 83.218,54.719 83.218,53.928 R9.2@84.454,52.692 ; C4.1@94.143,81.155 94.639,80.659 U1.47 ; C4.1 94.215,81.327 94.215,82.531 v1(94.234,82.55) ; R1.2@98.109,62.896 98.248,62.757 99.168,62.757 v1(99.187,62.738) ; C2.2@98.109,67.384 98.109,67.484 99.095,68.47 99.095,69.933 U1.23 ; R5.2 98.926,81.314 98.926,82.67 v1(98.933,82.677) ; U1.35 101.901,76.407 101.931,76.377 102.544,76.377 102.866,76.699 103.53,76.699 ; C1.2 103.629,77.108 104.756,77.108 v1(104.775,77.089) ; v1(112.268,75.565) 112.287,75.584 114.708,75.584 U2.4
  Top Layer w0.8: U2.5 U2.4
  Top Layer w1: S2.5 77.613,81.086 77.613,80.822 77.638,80.797 RT1.2
NetD1_2: D1.2 R1.1 | length 2.2
  Top Layer w0.4: R1.1 96.047,62.834 96.047,64.983 D1.2
NetD2_1: D2.1 R2.1 | length 2.1
  Top Layer w0.3: D2.1 102.636,67.464 102.737,67.564 R2.1
NetD2_2: D2.2 R3.1 | length 2.4
  Top Layer w0.3: D2.2 104.349,65.649 104.794,65.204 R3.1
NetD2_3: D2.3 R4.1 | length 1.9
  Top Layer w0.3: D2.3 101.836,64.153 R4.1
NetJ1_38: J1.38 R9.1 | length 12.7
  Top Layer w0.3: v3(76.454,53.975) 76.454,53.948 76.474,53.928 J1.38
  Top Layer w0.4: R9.1 84.582,50.664 v3@84.582,49.558
  Bottom Layer w0.4: v3(76.454,53.975) 80.899,49.53 v3(84.582,49.53)
NetJ1_42: J1.42 R10.1 | length 3.2
  Top Layer w0.4: J1.42 79.524,52.425 79.524,53.525 80.918,54.919 R10.1
NetJ3_15: J3.15 U2.3 | length 20.3
  Top Layer w0.6: U2.3 115.541,78.232 117.348,80.039 117.348,91.694 J3.15
NetJ3_16: J3.16 U2.6 | length 42.8
  Top Layer w0.6: U2.6 115.541,70.612 119.761,74.832 119.761,90.678 124.841,95.758 124.841,98.582 124.49,98.933 119.507,98.933 J3.16
NetR5_1: R5.1 U1.44 | length 3.3
  Top Layer w0.3: U1.44 96.139,80.427 96.92,81.208 R5.1
NetR6_1: R6.1 S2.1 S2.3 | length 52.2
  Top Layer w0.6: v2(86.614,67.437) 86.615,67.438 R6.1 R6.1
  Top Layer w1: S2.1 65.439,98.18 65.439,100.745 66.802,102.108 70.104,102.108 71.811,100.401 71.811,98.344 S2.3
  Bottom Layer w0.6: S2.3 72.06,93.865 76.962,88.963 76.962,74.93 84.455,67.437 v2(86.614,67.437)
PA1: R7.1 R11.1 R12.2 RT1.1 U1.11 | length 19.9
  Top Layer w0.3: R11.1 90.24,71.907 U1.11
  Top Layer w0.4: RT1.1 79.574,80.786 83.243,80.786 R7.1 83.346,80.682 83.346,75.579 R12.2 86.761,75.486 90.011,72.236 R11.1
PA2: R6.2 R8.1 U1.12 | length 5.9
  Top Layer w0.3: R8.1 90.011,69.95 91.186,71.125 91.186,71.231 91.362,71.407 U1.12
  Top Layer w0.4: R8.1 90.045,69.816 90.045,67.474 R6.2
PA3: S1.2 U1.13 | length 14.1
  Top Layer w0.3: v1(93.979,68.736) 93.979,68.79 94.129,68.94 94.129,69.967 U1.13 ; v3@94.234,57.277 S1.2
  Bottom Layer w0.3: v1(93.979,68.736) v1(93.979,68.736) 93.98,67.183 94.234,66.929 v3(94.234,57.305)
PA4: BZ1.1 U1.14 | length 34.9
  Top Layer w0.3: U1.14 94.639,68.737 94.742,68.634 v1(94.742,68.58)
  Top Layer w0.6: BZ1.1 82.873,65.151 91.313,65.151 v1(94.742,68.58)
PA7: U1.17 U2.1 | length 28.1
  Top Layer w0.3: v1(96.037,68.554) 96.049,68.566 96.049,69.254 96.088,69.293 U1.17@96.088,69.926
  Top Layer w0.381: U1.17@96.088,69.926 U1.17 ; v2(111.887,83.185) 111.948,83.246 114.75,83.246 U2.1
  Bottom Layer w0.381: v1(96.037,68.554) 96.444,68.961 100.457,68.961 101.346,69.85 101.346,72.802 101.569,73.025 101.727,73.025 v2(111.887,83.185)
PB0: D1.1 U1.18 | length 3.2
  Top Layer w0.2: U1.18 96.647,69.969 96.647,68.199
  Top Layer w0.4: D1.1 96.213,67.081 96.363,67.231 96.363,67.915 96.647,68.199
PB6: R2.2 U1.42 | length 82.9
  Top Layer w0.3: U1.42 97.139,79.794 97.275,79.93 v1(97.275,79.984) ; R2.2 v2(108.204,67.564)
  Bottom Layer w0.3: v1(97.275,79.984) 97.24,80.018 97.24,84.624 90.697,91.167 90.697,96.412 91.948,97.663 105.918,97.663 117.729,85.852 117.729,67.945 116.84,67.056 109.601,67.056 109.093,67.564 v2(108.204,67.564)
PB7: R3.2 U1.43 | length 85.8
  Top Layer w0.3: U1.43 v1@96.639,79.983 ; R3.2 106.841,65.151 v2(108.204,65.151)
  Bottom Layer w0.3: v1(96.64,79.984) 96.64,84.462 90.297,90.805 90.297,96.906 91.564,98.174 91.567,98.171 106.045,98.171 106.048,98.174 106.296,98.174 118.491,85.979 118.491,68.072 117.069,66.65 109.703,66.65 v2(108.204,65.151)
PB8: R4.2 U1.45 | length 99.8
  Top Layer w0.3: v1(95.624,79.984) 95.631,79.976 95.631,78.345 U1.45 ; v2(100.584,61.849) 100.6,61.865 102.092,61.865 R4.2
  Bottom Layer w0.3: v1(95.624,79.984) 95.624,84.843 89.662,90.805 89.662,97.028 91.316,98.682 91.564,98.682 91.567,98.679 106.553,98.679 119.126,86.106 119.126,66.548 118.11,65.532 109.855,65.532 104.902,60.579 100.76,60.579 100.584,60.755 v2(100.584,61.849)
PB12: U1.25 U2.2 | length 17.7
  Top Layer w0.3: U1.25 102.495,71.407 102.555,71.348 v1(102.609,71.348) ; v2(112.014,80.518) 112.091,80.595 114.639,80.595 U2.2
  Bottom Layer w0.3: v1(102.609,71.348) 102.663,71.348 102.798,71.483 102.979,71.483 v2(112.014,80.518)
PB13: U1.26 U2.7 | length 15.4
  Top Layer w0.3: U1.26 102.479,71.907 102.555,71.983 v1(102.609,71.983) 102.622,71.996 106.413,71.996 v2(106.426,72.009)
  Top Layer w0.381: v2(112.185,68.065) 112.189,68.068 114.812,68.068 U2.7
  Bottom Layer w0.381: v2(106.426,72.009) 110.37,68.065 v2(112.185,68.065)
SERVO: J4.190 U1.21 | length 31.3
  Top Layer w0.3: v1(97.917,68.326) 97.917,68.38 98.139,68.602 U1.21
  Bottom Layer w0.4: v1(97.917,68.326) 97.917,58.674 101.854,54.737 113.665,54.737 J4.190
SWCLK: J2.189 U1.37 | length 18.5
  Top Layer w0.3: U1.37 99.639,79.881 99.688,79.93 v1(99.688,79.984)
  Bottom Layer w0.6: J2.189 97.79,81.881 v1(99.688,79.984)
SWDIO: J2.190 U1.34 | length 23.4
  Top Layer w0.3: U1.34 101.079,75.917 103.041,75.917 103.197,76.073 v1(103.251,76.073)
  Bottom Layer w0.6: J2.190 100.33,83.058 103.251,80.137 v1(103.251,76.073)
USB_D_N: J1.40 J1.44 U4.142 | length 7.2
  Top Layer w0.381: v3(76.708,51.181) 76.712,51.185 76.712,51.482 76.898,51.669 76.898,51.689 ; 76.974,51.712 J1.44 ; J1.40 77.974,53.937 78.74,54.703 78.74,55.499 ; v3@77.978,51.153 v3(77.978,51.181) J1.40@77.978,52.375
  Bottom Layer w0.381: v3(76.708,51.181) v3(77.978,51.181)
USB_D_P: J1.39 J1.43 U4.140 | length 10
  Top Layer w0.381: 76.84,55.499 76.84,54.703 77.474,54.069 J1.39 77.474,51.049 77.216,50.791 77.216,49.88 77.439,49.657 78.517,49.657 78.74,49.88 78.74,51.054 78.515,51.28 J1.43@78.515,52.07
VBUS: C3.2 J1.36 J1.37 J4.188 S1.1 S2.2 S2.4 S2.6 U3.2 U4.144 | length 136.6
  Top Layer w0.4: J1.36 75.324,53.545 75.035,53.834 75.035,54.589 C3.2 75.012,55.166 75.012,56.089 76.327,57.404 77.47,57.404 77.724,57.658 U4.144
  Top Layer w0.6: 75.324,48.781 J1.36 ; 80.124,48.755 J1.37 ; S1.1 S1.1@95.186,52.895 ; J4.188@110.299,52.895 J4.188
  Top Layer w1: 75.324,48.781 76.607,47.498 77.737,47.498 ; 80.124,48.755 78.867,47.498 77.737,47.498 ; S1.1 94.107,53.848 91.577,53.848 86.736,49.007 86.736,47.6 85.237,46.101 79.134,46.101 77.737,47.498 ; S1.1@95.186,52.895 J4.188@110.299,52.895
  Int2 (PWR) w1: 58.489,79.444 58.102,79.057 ; 67.274,93.218 70.14,93.218 71.969,91.389 S2.4 ; v2(68.076,57.238) 57.316,57.238 ; v2(68.58,56.388) 67.056,54.864 59.69,54.864 57.316,57.238 ; S2.2 68.707,94.742 S2.6 58.102,84.138 58.102,79.057 ; 57.316,57.238 56.515,58.039 56.515,77.47 58.102,79.057
pads on no net: J1.41 J1.45 U1.2 U1.3 U1.4 U1.5 U1.6 U1.7 U1.10 U1.15 U1.16 U1.19 U1.20 U1.22 U1.27 U1.28 U1.29 U1.30 U1.31 U1.38 U1.39 U1.40 U1.41 U1.46 U2.9 U2.10 U2.11 U2.12 U2.13 U2.14 U2.15
copper on no net: | length 266.4
  Top Layer w0.254: 54.483,49.212 ccw(c58.483,49.212) 58.483,45.212 126.556,45.212 ccw(c126.556,49.212) 130.556,49.212 130.556,101.791 ccw(c126.556,101.791) 126.556,105.791 58.483,105.791 ccw(c58.483,101.791) 54.483,101.791 54.483,49.212

## Polygon pours and split planes (outlines as drawn)
VBUS on Top Layer "VBUS_L01_P000" (solid, pour order 0): 69.342,56.007 68.707,55.372 67.31,55.372 66.802,55.88 66.802,57.15 66.929,57.15 67.945,58.166 67.945,60.325 70.231,60.325 71.501,59.055 71.501,57.531 73.914,57.531 75.692,55.753 75.692,51.689 74.93,51.689 74.93,53.34 74.803,53.34 73.406,54.737 73.406,56.007
+3.3V on Top Layer "+3.3V_L01_P001" (solid, pour order 1): 62.357,64.77 60.071,62.484 58.674,62.484 58.674,60.833 60.198,60.833 61.087,59.944 64.897,59.944 64.897,61.976 66.167,63.246 70.485,63.246 70.485,64.77
GND on Int1 (GND) "GND_L02_P002" (solid, pour order 2): 55.499,104.394 55.626,104.267 128.778,104.267 128.778,47.371 55.499,47.371

## Silkscreen, mask and mechanical layers (free items; w line width, h text height)
Top Overlay:
  lines w0.254: 91.059,90.932 106.934,90.932 106.934,102.87 91.059,102.87 91.059,90.932 ; 105.664,47.625 105.664,60.452 106.807,60.452 122.809,60.452 122.809,47.625 105.664,47.625
  text "IN1" at 115.389,101.673 h1.4
  text "IN2" at 120.977,101.673 h1.4
  text "ST-LINK" at 96.239,100.701 h1.4
  text "+3V3" at 93.191,92.187 h1
  text "SWCLK" at 95.731,92.187 h1
  text "SWDIO" at 99.541,92.187 h1
  text "GND" at 103.097,92.187 h1
  text "TEAM 3 PCB" at 86.833,86.476 h2
  text "SERVO MOTOR" at 109.447,57.775 h1.4
  text "+5V" at 109.066,49.007 h1
  text "GND" at 111.479,49.007 h1
  text "SERVO" at 114.019,49.007 h1
  text "+3V3" at 117.829,49.007 h1

## Text inside footprints (layer, text, board x,y; h text height)
BZ1: Top Overlay "+" at 70.734,80.063 h2 r270